# EAGLE board Serial I2C Bridge (EAGLE 6.1)
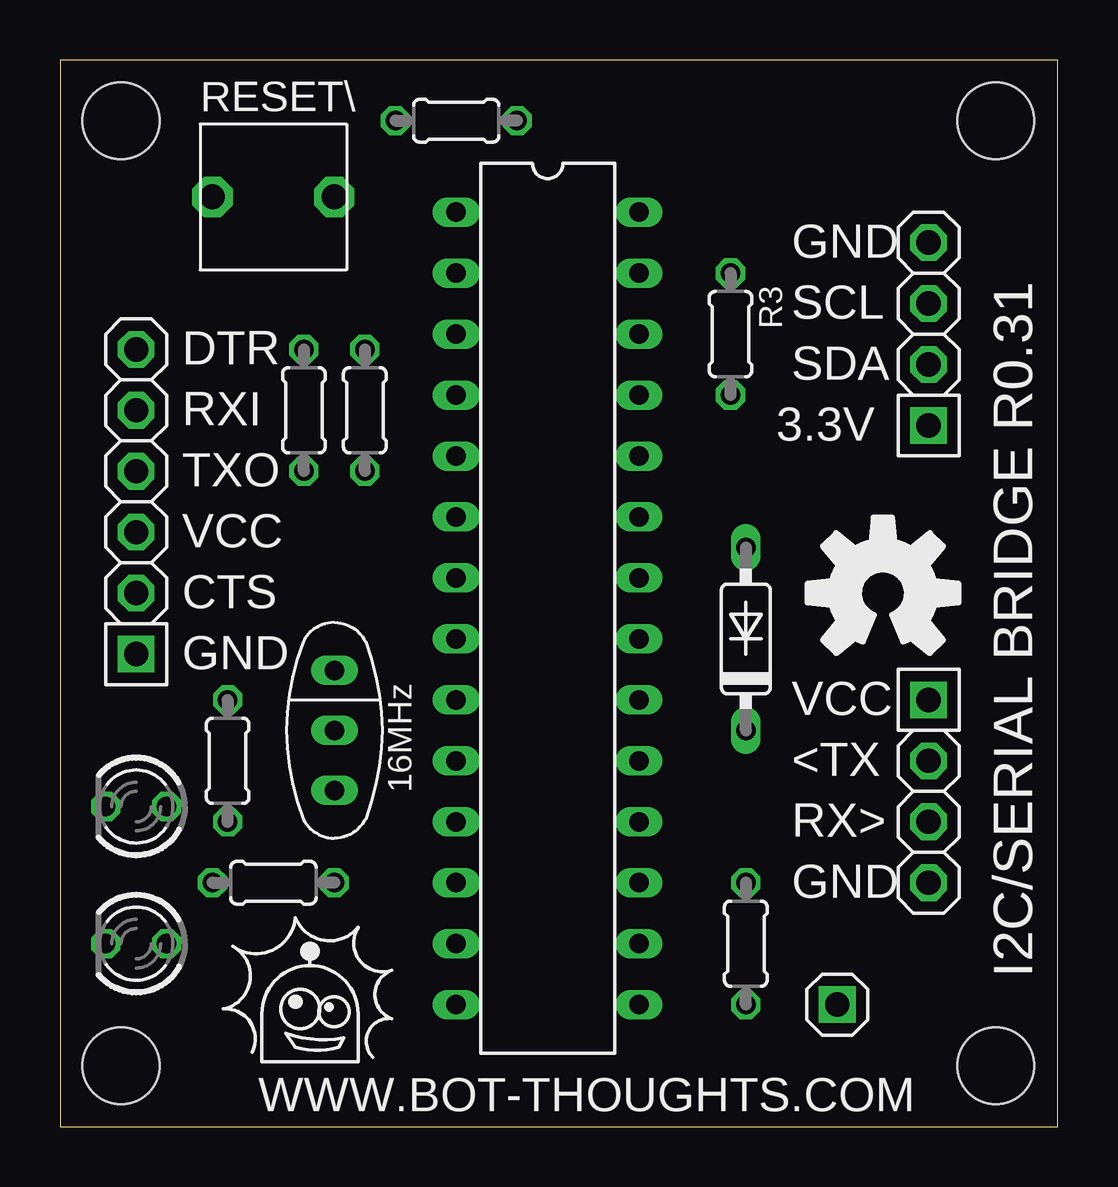
[diagram p0: board, top side]
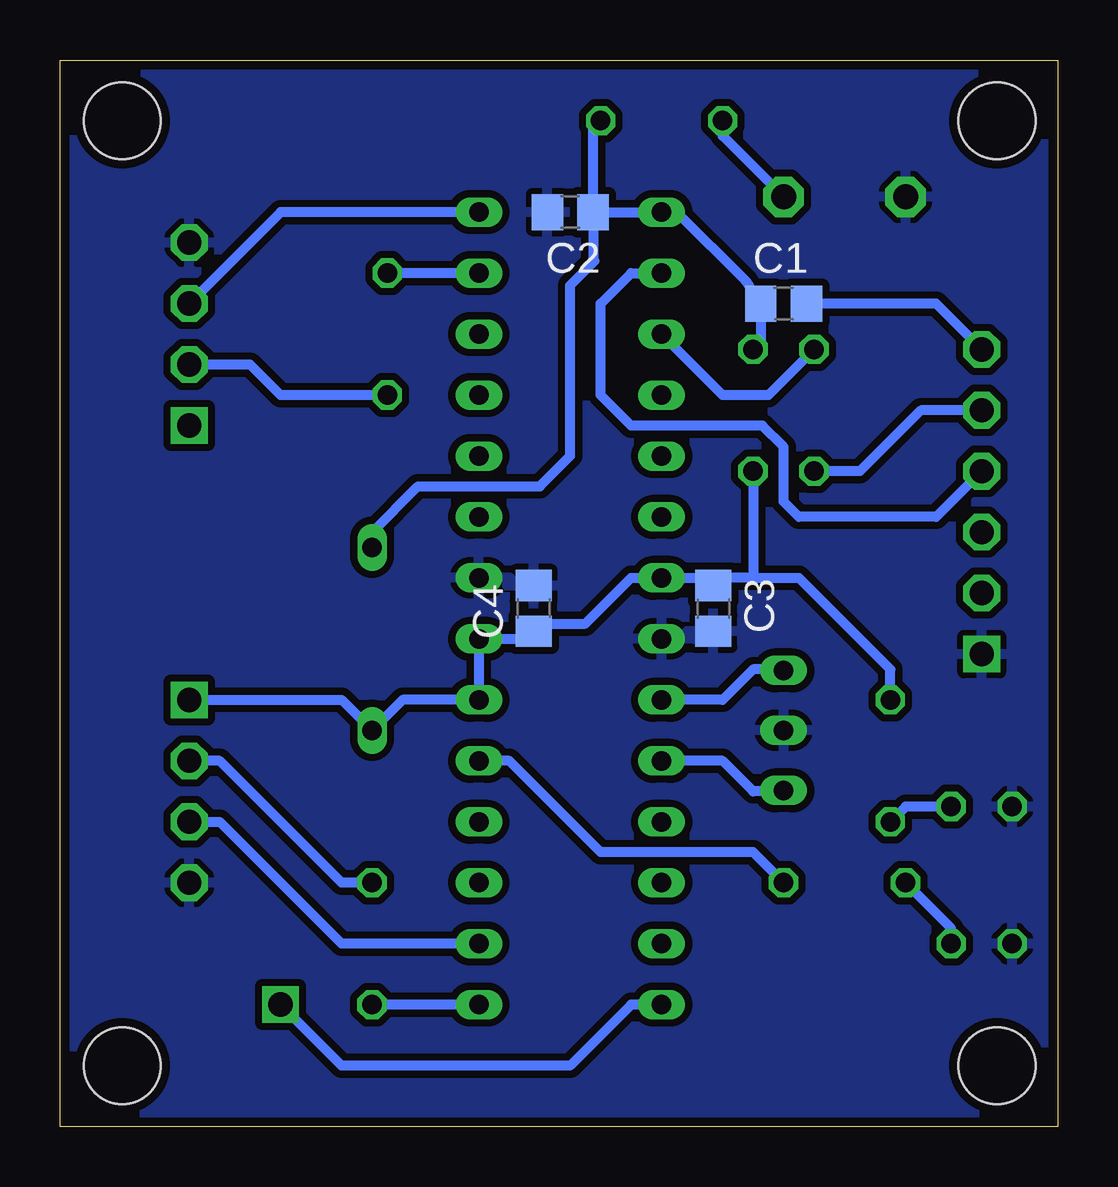
[diagram p1: board, bottom side, seen from below]

Size 41.58 x 44.44 mm. Coordinates in mm from the lower left corner, seen from the top.
Outline: 0,0 41.58,0 41.58,44.44 0,44.44 0,0
Copper layers (1*16): Top 0.0356mm / dielectric 1.5011mm / Bottom 0.0356mm
Design rules: minimum track width 6mil, minimum drill 13mil, track to track 6mil, track to pad 6mil, pad to pad 6mil, via to via 6mil, smd to smd 6mil, copper to edge 15mil, drill to drill 6mil, minimum pad ring 7mil, minimum via ring 7mil, stop-mask expansion 4mil, vias tented up to drill 0mil, thermal gap 10mil
Holes 3.2 mm at 2.54,41.91 38.99,41.91 38.99,2.54 2.54,2.54

## Footprints (pad centres in the part's own frame; a part is rotated, then mirrored left to right if it is on the bottom)
C0805 = smd 1.3 x 1.5: 1 -0.95,0; 2 0.95,0
DO35-7 = drill 0.813 long: A 3.81,0; C -3.81,0
DIL28-3 = drill 0.813 long: 1 -16.51,-3.81; 2 -13.97,-3.81; 3 -11.43,-3.81; 4 -8.89,-3.81; 5 -6.35,-3.81; 6 -3.81,-3.81; 7 -1.27,-3.81; 8 1.27,-3.81; 9 3.81,-3.81; 10 6.35,-3.81; 11 8.89,-3.81; 12 11.43,-3.81; 13 13.97,-3.81; 14 16.51,-3.81; 15 16.51,3.81; 16 13.97,3.81; 17 11.43,3.81; 18 8.89,3.81; 19 6.35,3.81; 20 3.81,3.81; 21 1.27,3.81; 22 -1.27,3.81; 23 -3.81,3.81; 24 -6.35,3.81; 25 -8.89,3.81; 26 -11.43,3.81; 27 -13.97,3.81; 28 -16.51,3.81
1X04-S = drill 1.016 square: 1 -3.81,0 | drill 1.016 octagon: 2 -1.27,0; 3 1.27,0; 4 3.81,0
1X01-S = drill 1.016 square: 1 0,0
1X06-S = drill 1.016 square: 1 -6.35,0 | drill 1.016 octagon: 2 -3.81,0; 3 -1.27,0; 4 1.27,0; 5 3.81,0; 6 6.35,0
LED3MM = drill 0.813 octagon: A -1.27,0; K 1.27,0
CSTLS_G9 = drill 0.813 long: 1 -2.5,0; 2 0,0; 3 2.5,0
0204/5 = drill 0.813 octagon: 1 -2.54,0; 2 2.54,0
EVQ11X09 = drill 1.041 pad 1.676 octagon: 1 0,0; 2 5.08,0

## Placement (x,y rotation side)
C1  0.1uF  [C0805]  11.43,34.29 0 bottom
C2  0.1uF  [C0805]  20.32,38.1 180 bottom
C3  0.1uF  [C0805]  14.35,21.59 270 bottom
C4  0.1uF  [C0805]  21.84,21.59 90 bottom
D2  1N4148  [DO35-7]  28.57,20.32 90 top
IC1  ATmega328P  [DIL28-3]  20.32,21.59 270 top
JP1  I2C  [1X04-S]  36.2,33.02 90 top
JP2  CAM  [1X04-S]  36.2,13.97 270 top
JP3  RDY  [1X01-S]  32.38,5.08 0 top
JP4  FTDI  [1X06-S]  3.17,26.04 90 top
LED1  STAT1  [LED3MM]  3.17,7.62 180 top
LED2  STAT1  [LED3MM]  3.17,13.34 180 top
Q1  16MHz  [CSTLS_G9]  11.43,16.51 270 top
R1  1K  [0204/5]  12.7,29.84 270 top
R2  330  [0204/5]  8.89,10.16 180 top
R3  1K  [0204/5]  27.94,33.02 270 top
R4  1K  [0204/5]  28.57,7.62 90 top
R5  330  [0204/5]  16.51,41.91 180 top
R6  1K  [0204/5]  10.16,29.84 270 top
R7  330  [0204/5]  6.99,15.24 270 top
S1  RESET\  [EVQ11X09]  6.35,38.73 0 top

## Library data of the parts
C1 = rcl; PARTNO: CC0603ZRY5V7BB104
C2-C4 = rcl; DATABASE: ./../../../eagle/PARTSDB.TXT; PARTNO: C1608X5R0J105K
D2 = diode; DATABASE: ./../../../eagle/PARTSDB.TXT
IC1 = atmel; PARTNO: DEV-10524
JP1 JP2 = pinhead-2; PARTNO: 2211S-04G
JP3 = pinhead-2; BOM: EXCLUDE
JP4 = pinhead-2; PARTNO: 2211S-06G
LED1 = led; BOM: EXCLUDE
LED2 = led; BOM: EXCLUDE; DATABASE: ./../../../eagle/PARTSDB.TXT
Q1 = murata-resonators; PARTNO: AWCR-16.00MD
R1 = rcl; BOM: EXCLUDE
R2 = rcl; PARTNO: CRCW0603330RJNEA
R3-R7 = rcl; DATABASE: ./../../../eagle/PARTSDB.TXT; PARTNO: CRCW0603330RJNEA
S1 = ads4; PARTNO: SALVAGE

## Nets
3.3V: JP1.1
5V: C3.1 C4.1 D2.C IC1.7 IC1.20 IC1.21 JP2.1 R1.2 R7.1
<RX: IC1.16 JP2.3
<RXD/TXO: IC1.2 JP4.4
DTR: C1.2 JP4.6
GND: C2.2 C3.2 C4.2 IC1.8 IC1.22 JP1.4 JP2.4 JP4.1 LED1.K LED2.K Q1.2 S1.1
LV_SDA: JP1.2 R3.2
LV_TX>: JP2.2 R4.2
LV_TXD/RXI>: JP4.5 R6.2
N$2: IC1.9 Q1.1
N$3: IC1.10 Q1.3
N$4: LED1.A R2.2
N$5: IC1.19 R2.1
N$6: C1.1 C2.1 D2.A IC1.1 R1.1 R5.1
N$7: R5.2 S1.2
N$8: LED2.A R7.2
READY: IC1.14 JP3.1
RXI/TXD>: IC1.3 R6.1
SCL: IC1.28 JP1.3
SDA: IC1.27 R3.1
TX>: IC1.15 R4.1

## Tracks (layer width: path | path; a pad name or v marks a point on that pad's centre or on a via)
5V
  Bottom 0.406: JP2.1 29.84,17.78 D2.C 27.3,17.78 IC1.20 IC1.21 22.23,20.32 21.65,20.89 | R1.2 12.7,22.86 | 12.7,22.86 10.79,22.86 6.99,19.05 R7.1 | C4.1 21.65,20.89 | 21.65,20.89 21.59,20.95 19.68,20.95 17.78,22.86 IC1.7 14.8,22.86 C3.1 14.48,22.35 13.97,22.86 12.7,22.86
<RX
  Bottom 0.406: IC1.16 29.84,7.62 34.92,12.7 JP2.3
<RXD/TXO
  Bottom 0.406: IC1.2 17.78,35.56 19.05,34.29 19.05,30.48 17.78,29.21 12.32,29.21 11.43,28.32 11.43,26.04 10.79,25.4 5.08,25.4 JP4.4
DTR
  Bottom 0.406: JP4.6 5.08,34.29 C1.2
GND
  pour Bottom (isolate 0.305): 0,44.45 41.27,44.45 41.27,0 0,0
LV_SDA
  Bottom 0.406: R3.2 32.38,30.48 33.66,31.75 JP1.2
LV_TX>
  Bottom 0.406: R4.2 29.84,10.16 34.92,15.24 JP2.2
LV_TXD/RXI>
  Bottom 0.406: JP4.5 5.71,29.84 8.26,27.3 R6.2
N$2
  Bottom 0.406: IC1.9 13.97,17.78 12.7,19.05 12.11,19.05 Q1.1
N$3
  Bottom 0.406: IC1.10 13.97,15.24 12.7,13.97 12.03,13.97 Q1.3
N$4
  Bottom 0.406: LED1.A 4.45,8.26 R2.2
N$5
  Bottom 0.406: IC1.19 22.86,15.24 19.05,11.43 12.7,11.43 R2.1
N$6
  Bottom 0.406: R1.1 12.38,32.7 C1.1 13.02,35.24 15.88,38.1 IC1.1 C2.1 | C2.1 19.37,41.59 R5.1 | D2.A 28.57,24.77 26.67,26.67 21.59,26.67 20.32,27.94 20.32,35.05 19.3,36.07 19.37,36.13 C2.1
N$7
  Bottom 0.406: S1.2 13.97,41.27 R5.2
N$8
  Bottom 0.406: LED2.A 6.35,13.34 R7.2
READY
  Bottom 0.406: IC1.14 17.78,5.08 20.32,2.54 29.84,2.54 JP3.1
RXI/TXD>
  Bottom 0.406: R6.1 12.06,30.48 13.97,30.48 IC1.3
SCL
  Bottom 0.406: IC1.28 32.38,38.1 JP1.3
SDA
  Bottom 0.406: IC1.27 R3.1
TX>
  Bottom 0.406: IC1.15 R4.1

## Text on the board
tNames: GND | SCL | DTR | SDA | RXI | 3.3V | TXO | VCC | CTS | GND | VCC | <TX | RX> | GND | I2C/SERIAL BRIDGE R0.31 | WWW.BOT-THOUGHTS.COM